# Altium PCB MM_2.0_pcb.PcbDoc (part 2 of 2)
Units mm, origin at the board's own origin, x right, y up, seen from the top; angles counter-clockwise.
Board outline 100 x 100 mm, 4 copper layers (Top_Layer, INT_L1_GND, INT_L2_GND, Bottom_Layer), stack 1.586 mm thick; 74 components, 72 nets, 343 pads, 105 vias.
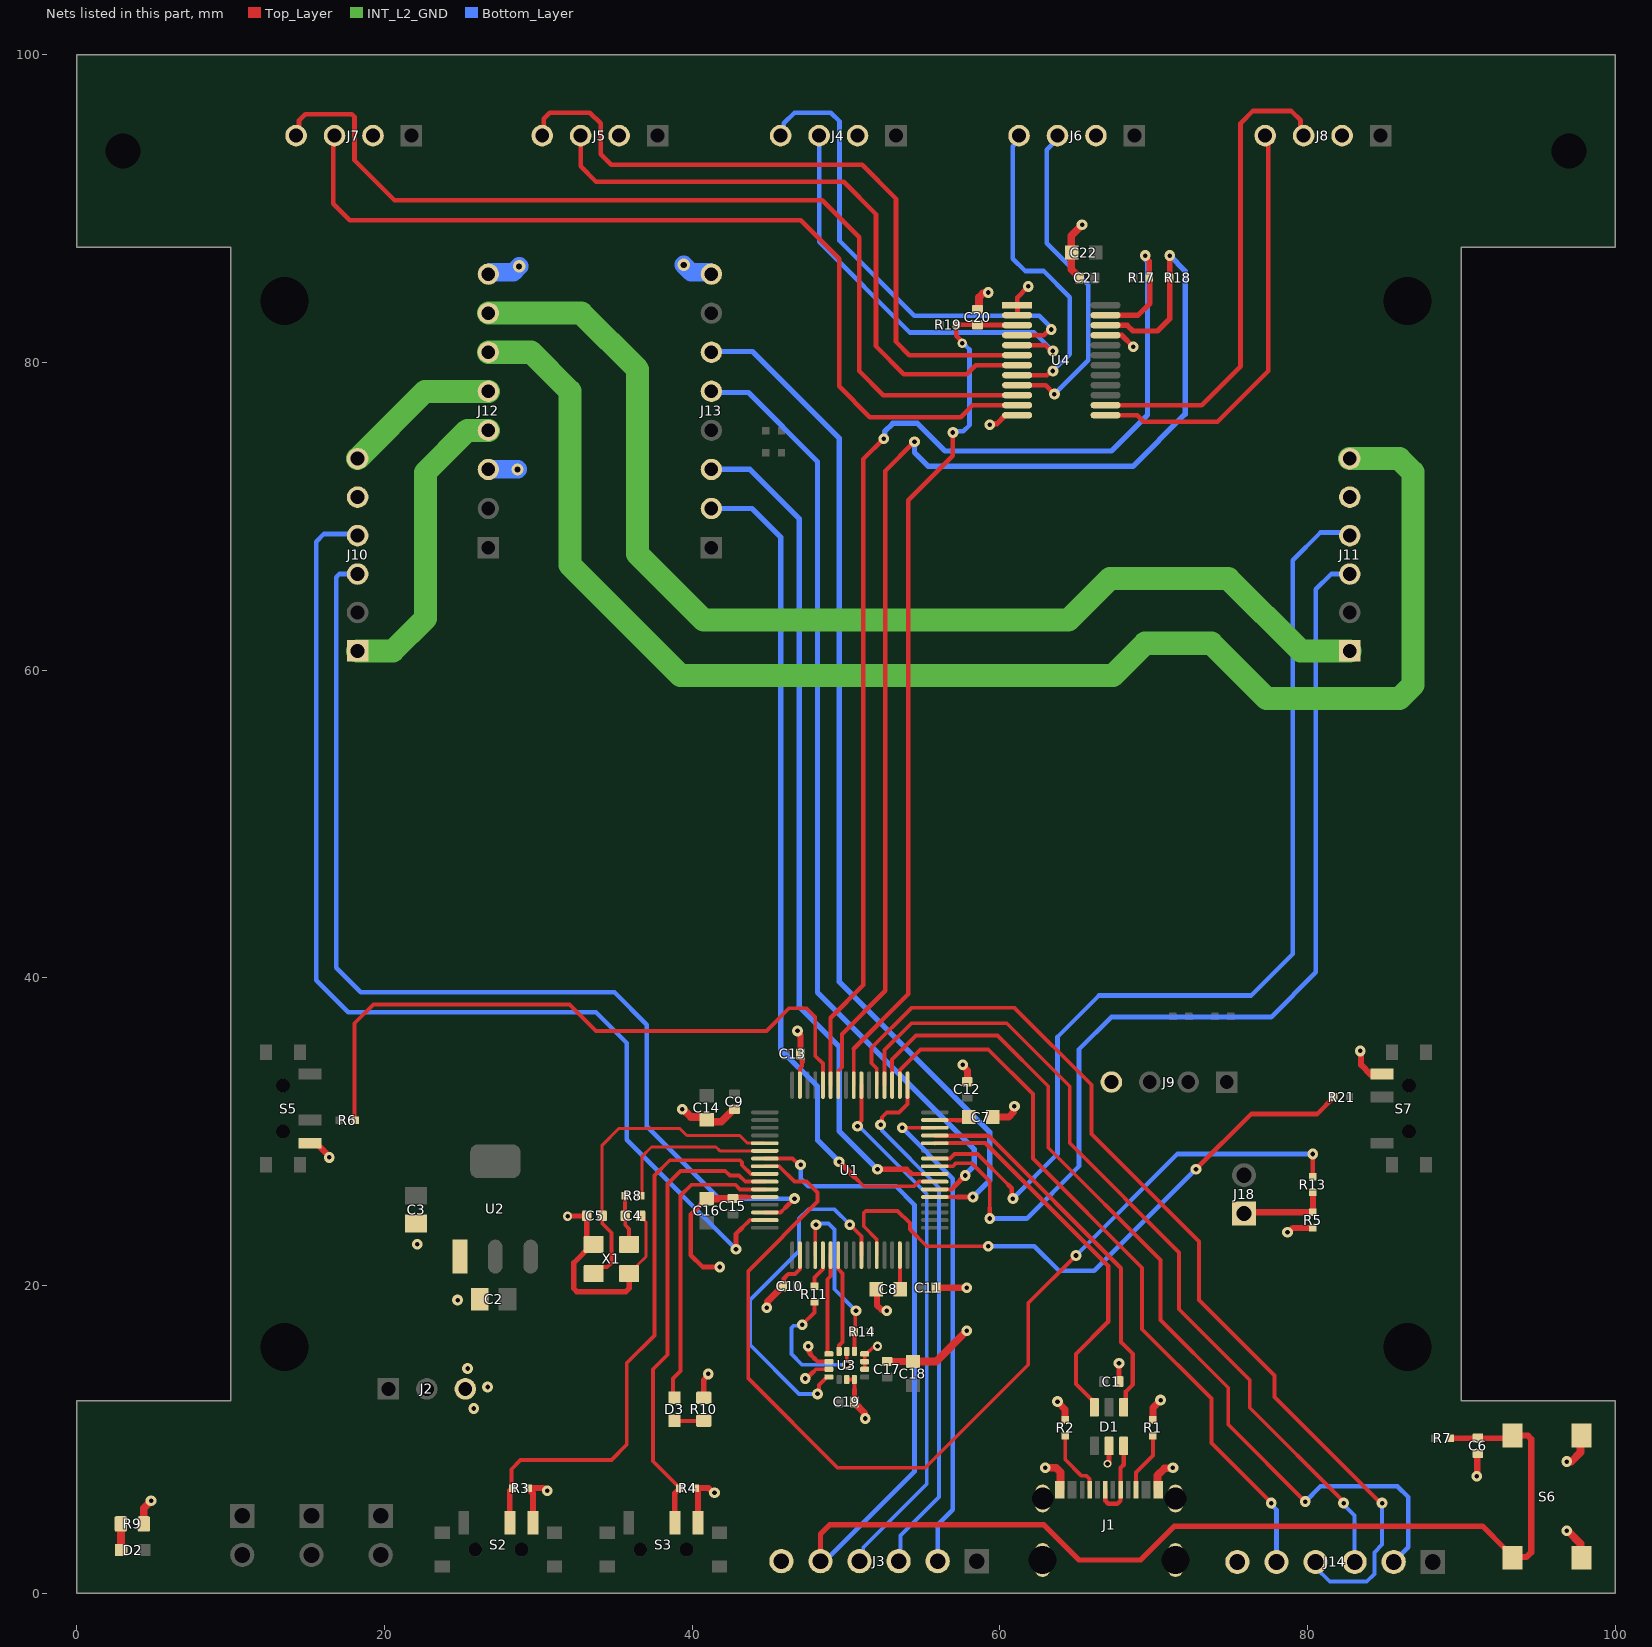
[diagram p4: the nets of this part, all layers, seen from the top]

## Via types
v1: diameter 0.7, hole 0.3, Top_Layer to Bottom_Layer, 92 vias
v2: diameter 0.6, hole 0.3, Top_Layer to Bottom_Layer, 6 vias
v3: diameter 0.8, hole 0.4, Top_Layer to Bottom_Layer, 4 vias
v4: diameter 0.9, hole 0.4, Top_Layer to Bottom_Layer, 2 vias
v5: diameter 0.5, hole 0.3, Top_Layer to Bottom_Layer, 1 vias

## Nets (pads, with @x,y where several pads share a name; then routed paths per layer and width w, separated by ;. In a path a pad name is that pad's centre, name@x,y a point inside that pad or via, vN(x,y) a via of type N, cw(c..) or ccw(c..) an arc to the next point about the centre after c; other vN are vias at no path point) (continued)
ESD_USB_D_P: D1.3 J1.A6 J1.B6 | length 5.5
  Top_Layer w0.281: J1.A6@66.85,6.725 66.85,6.015 67.055,5.809 67.641,5.809 67.841,6.009 67.841,6.716 J1.B6@67.85,6.725 67.843,6.732 67.843,8.143 68.05,8.35 D1.3@68.05,9.57
GND: C1.1 C2.2 C3.2 C4.1 C5.1 C6.1 C7.2 C8.2 C9.1 C10.1 C11.1 C12.1 C13.1 C14.2 C15.1 C16.2 C17.1 C18.2 C19.1 C20.1 C21.1 C22.2 D1.2 J1.A1B12 J1.B1A12 J1.S1 J1.S2 J1.S3 J1.S4 J2.3 J3.6 J4.2 J5.2 J6.2 J7.2 J8.2 J9.4 J10.5 J11.5 J12.3 J12.8 J13.8 J14.6 R1.1 R2.1 R3.1 R4.1 R5.1 R9.1 R10.1 S2.3 S3.3 S5.3 S6.3 S6.4 S7.3 U1.12 U1.18 U1.63 U2.1 U3.2 U3.3 U3.6 U3.7 U3.9 U3.10 U3.11 U4.1 U4.2 U4.12 U4.21 X1.2 X1.4 | length 110.9
  Top_Layer w0.2: X1.4@35.9,20.775 36,20.775 36.45,21.225 36.45,21.325 37,21.875 37,24.125 36.65,24.475 C4.1@36.65,24.525
  Top_Layer w0.25: 43.55,25.75 U1.12@44.725,25.75 ; 46.15,20.65 46.25,20.75 46.686,20.75 47,21.064 U1.18@47,21.975 ; U1.63@47,33.025 47,34.1 47.15,34.25 47.15,34.55 ; 47.85,14.35 48.05,14.55 U3.3@48.885,14.55 ; 47.95,15.25 48.15,15.05 U3.2@48.885,15.05 ; U3.6@50.05,13.885 U3.7@50.55,13.885 50.55,13.25 ; U3.9@51.215,14.55 U3.10@51.215,15.05 U3.11@51.215,15.55 51.265,15.6 51.385,15.6 51.768,15.983 51.983,15.983 v2(52.05,16.05) ; R2.1@64.25,11.262 R2.1@64.313,11.325 ; R1.1@69.95,11.262 R1.1@69.987,11.299
  Top_Layer w0.3: C16.2@40.95,25.63 40.92,25.63 39.9,24.61 39.9,21.976 40.676,21.2 v1(41.8,21.2) ; 43.35,25.75 43.55,25.75 ; C10.1@45.85,19.95 45.95,20.05 45.95,20.45 46.15,20.65 ; v1(47.35,13.95) 47.45,13.95 47.85,14.35 ; 47.65,15.65 47.65,15.55 47.95,15.25 ; C19.1@50.55,12.425 50.55,13.25 ; U4.2@61.125,83.075 61.15,83.1 61.15,83.7 U4.1@61.125,83.725 61.125,84.225 v1(61.85,84.95)
  Top_Layer w0.35: v2(31.9,24.5) 31.913,24.513 33.137,24.513 C5.1@33.15,24.525 33.15,23.05 X1.2@33.525,22.675 ; X1.2@33.6,22.675 X1.2@33.525,22.675 ; X1.4@35.9,20.775 35.9,19.805 35.695,19.6 32.505,19.6 32.3,19.805 32.3,21.475 33.5,22.675 X1.2@33.525,22.675 ; R10.1@40.75,12.7 40.75,13.855 41.05,14.155 v1(41.05,14.25) ; C15.1@42.64,25.64 C15.1@42.65,25.65 42.75,25.75 43.35,25.75 ; C13.1@47.05,35.05 47.15,34.95 47.15,34.55 ; v1(47.55,16.05) 47.617,15.983 47.617,15.683 47.65,15.65 ; v1(59.35,75.95) 59.417,76.017 59.799,76.017 60.357,76.575 U4.12@61.125,76.575 ; U4.21@66.875,81.775 66.889,81.761 67.939,81.761 v1(68.675,81.025) ; v5(67,8.4) 67,8.441 67.1,8.541 D1.2@67.1,9.57 ; C1.1@67.75,13.75 v1(67.75,14.95) ; S7.3@84.125,33.7 84.8,33.7 S7.3@84.85,33.75
  Top_Layer w0.4: S5.3@15.15,29.25 15.55,29.25 16.4,28.4 v1(16.4,28.325) ; S2.3@29.65,4.575 29.65,6.5 29.337,6.813 R3.1@29.337,6.825 30.319,6.825 30.494,6.65 v1(30.575,6.65) ; R4.1@40.212,6.825 41.069,6.825 41.369,6.525 v1(41.45,6.525) ; S3.3@40.375,4.575 R4.1@40.375,6.65 ; v1(46.85,36.55) 46.85,36.469 47.05,36.269 C13.1@47.05,35.05 ; C8.2@51.97,19.75 52.01,19.71 52.01,18.706 52.309,18.407 52.593,18.407 v1(52.65,18.35) ; v1(78.7,23.462) 78.781,23.462 79.057,23.738 R5.1@80.35,23.738 ; v1(83.425,35.25) 83.482,35.193 83.482,34.343 S7.3@84.125,33.7 ; v1(91,7.6) 91.037,7.637 91.037,9.038 C6.1@91.075,9.075
  Top_Layer w0.45: v1(44.85,18.55) 44.898,18.598 44.898,18.948 45.85,19.9 C10.1@45.85,19.95 ; C19.1@50.55,12.425 50.55,12.375 51.202,11.723 51.202,11.398 v1(51.25,11.35) ; C17.1@52.675,15.05 52.678,15.053 54.348,15.053 C18.2@54.35,15.055 ; C11.1@55.85,19.85 v1(57.85,19.85) ; v1(57.59,34.35) 57.59,34.282 57.89,33.982 C12.1@57.89,33.25 ; C7.2@59.55,30.95 60.587,30.95 60.902,31.265 60.902,31.602 v1(60.95,31.65) ; v1(63.75,12.45) 64.25,11.95 R2.1@64.25,11.262 ; R1.1@69.95,11.262 69.95,12.05 v1(70.45,12.55)
  Top_Layer w0.5: R9.1@4.35,4.5 4.35,5.525 v1(4.825,6) ; v1(39.35,31.45) 39.404,31.45 39.899,30.955 40.765,30.955 C14.2@40.95,30.77 41.07,30.65 41.9,30.65 42.7,31.45 C9.1@42.75,31.45 ; C16.2@40.95,25.63 40.96,25.64 C15.1@42.64,25.64 ; C18.2@54.35,15.055 55.855,15.055 v1(57.85,17.05) ; C20.1@58.55,83.45 58.6,83.45 58.65,83.5 58.65,84.25 58.912,84.512 59.212,84.512 v1(59.25,84.55) ; v1(62.95,8.15) 63.65,8.15 63.95,7.85 63.95,7.55 63.95,6.775 J1.A1B12@63.9,6.725 ; C21.1@65.175,85.5 65.175,85.55 64.65,86.075 64.65,88.25 v1(65.35,88.95) ; J1.B1A12@70.3,6.725 70.25,6.775 70.25,7.65 70.712,8.112 71.212,8.112 v1(71.25,8.15) ; v1(96.85,4.05) 96.916,4.05 97.75,3.216 97.75,2.375 S6.3@97.825,2.3 ; v1(96.85,8.55) 97.15,8.55 97.75,9.15 97.75,10.175 S6.4@97.825,10.25
  Bottom_Layer w1.2: J12.3@26.75,73.05 v3(28.65,73.05) ; J12.8@26.75,85.75 26.863,85.863 28.363,85.863 v3(28.75,86.25) ; v3(39.45,86.35) 39.937,85.863 41.137,85.863 J13.8@41.25,85.75
  other v1: 25.8,12 26.7,13.4 25.4,14.6 24.75,19.05 22.125,22.675
IMU_INT: U1.26 U3.4 | length 23
  Top_Layer w0.25: v1(48.15,12.95) 48.236,13.036 48.236,13.521 48.765,14.05 U3.4@48.885,14.05 ; v1(50.25,23.95) 51,23.2 U1.26@51,21.975
  Bottom_Layer w0.25: v1(48.15,12.95) 46.95,12.95 43.754,16.146 43.754,19.054 46.95,22.25 46.95,24.35 47.55,24.95 49.25,24.95 v1(50.25,23.95)
IMU_MISO: U1.22 U3.1 | length 6.6
  Top_Layer w0.25: U3.1@48.885,15.55 48.85,15.55 48.8,15.6 48.8,20.4 49,20.6 U1.22@49,21.975
IMU_MOSI: U1.23 U3.14 | length 6.5
  Top_Layer w0.25: U1.23@49.5,21.975 49.5,21.064 49.775,20.789 49.775,16.318 49.55,16.093 U3.14@49.55,15.715
IMU_NCS: R14.1 U1.20 U3.12 | length 11.9
  Top_Layer w0.25: U1.20@48,21.975 48,23.9 v1(48.05,23.95) ; U3.12@50.55,15.715 50.552,15.717 R14.1@50.554,16.98 50.602,17.028 50.602,18.302 v1(50.65,18.35)
  Bottom_Layer w0.25: v1(48.05,23.95) 48.136,24.036 48.864,24.036 49.25,23.65 49.25,19.75 v1(50.65,18.35)
IMU_SCLK: R11.1 U3.13 | length 9
  Top_Layer w0.25: v1(47.15,17.45) 47.95,18.25 R11.1@47.95,18.926 ; v2(50.05,14.85) U3.13@50.05,15.715
  Bottom_Layer w0.25: v1(47.15,17.45) 47.078,17.378 46.596,17.378 46.45,17.232 46.45,15.55 47.15,14.85 v2(50.05,14.85)
IMU_SCLK_R: R11.2 U1.21 | length 2.3
  Top_Layer w0.25: R11.2@47.95,19.95 47.95,20.514 48.5,21.064 U1.21@48.5,21.975
LM_ENC_CHA: J10.3 U1.14 | length 69.1
  Top_Layer w0.25: U1.14@44.725,24.75 45.75,24.75 46.05,25.05
  Top_Layer w0.3: 46.05,25.05 v1(46.65,25.65)
  Bottom_Layer w0.3: J10.3@18.25,66.25 17.05,66.25 16.85,66.05 16.85,40.65 18.45,39.05 34.95,39.05 37.05,36.95 37.05,30.35 41.75,25.65 v1(46.65,25.65)
LM_ENC_CHB: J10.4 U1.15 | length 72.9
  Top_Layer w0.25: 43.25,23.75 43.75,24.25 U1.15@44.725,24.25
  Top_Layer w0.3: v1(42.85,22.35) 42.85,23.35 43.25,23.75
  Bottom_Layer w0.3: J10.4@18.25,68.75 18.15,68.85 16.05,68.85 15.55,68.35 15.55,39.85 17.65,37.75 33.75,37.75 35.737,35.763 35.737,29.463 v1(42.85,22.35)
LM_N: J10.6 J12.5 | length 10.3
  INT_L2_GND w1.5: J10.6@18.25,73.75 22.63,78.13 J12.5@26.75,78.13
LM_P: J10.1 J12.4 | length 20
  INT_L2_GND w1.5: J10.1@18.25,61.25 20.55,61.25 22.65,63.35 22.65,72.85 25.39,75.59 J12.4@26.75,75.59
LM_PWM_INA: J13.2 U1.39 | length 54.5
  Top_Layer w0.25: 50.55,27.05 51.15,26.45 54.426,26.45 54.726,26.75 55,26.75 U1.39@55.775,26.75
  Top_Layer w0.35: v1(49.55,28.05) 50.55,27.05
  Bottom_Layer w0.35: J13.2@41.25,70.51 43.89,70.51 45.75,68.65 45.75,35.35 48.15,32.95 48.15,29.45 v1(49.55,28.05)
LM_PWM_INB: J13.3 U1.40 | length 55.3
  Top_Layer w0.25: 54.25,27.25 U1.40@55.775,27.25
  Top_Layer w0.35: v1(52.05,27.55) 53.95,27.55 54.25,27.25
  Bottom_Layer w0.35: J13.3@41.25,73.05 43.75,73.05 46.95,69.85 46.95,38.15 49.55,35.55 49.55,30.05 v1(52.05,27.55)
MCU_BOOT0: R6.2 U1.60 | length 43
  Top_Layer w0.25: R6.2@18.087,30.75 18.05,30.787 18.05,37.05 19.275,38.275 32.025,38.275 33.75,36.55 44.825,36.55 46.3,38.025 47.425,38.025 48,37.45 48,34.925 48.5,34.425 U1.60@48.5,33.025
MCU_BOOT1: R21.2 U1.28 | length 40.2
  Top_Layer w0.25: U1.28@52,21.975 52,23 51.15,23.85 51.15,24.704 51.296,24.85 53.35,24.85 54.15,24.05 54.15,23.65 55.25,22.55 v1(59.25,22.55)
  Top_Layer w0.3: v1(72.75,27.55) 76.35,31.15 80.625,31.15 81.713,32.238 R21.2@81.713,32.25
  Bottom_Layer w0.3: v1(59.25,22.55) 62.25,22.55 63.85,20.95 66.15,20.95 v1(72.75,27.55)
MCU_LED: D3.2 U1.11 | length 19.3
  Top_Layer w0.25: D3.2@38.85,12.7 38.75,12.8 38.75,13.95 39.25,14.45 39.25,25.85 39.95,26.55 42.816,26.55 43.116,26.25 U1.11@44.725,26.25
MCU_LED_K: D3.1 R10.2 | length 1.9
  Top_Layer w0.25: D3.1@38.85,11.2 R10.2@40.75,11.2
MCU_NRST: C6.2 J3.5 R7.1 S6.1 S6.2 U1.7 | length 101.2
  Top_Layer w0.25: U1.7@44.725,28.25 46.528,28.25 46.928,27.85 v1(47.05,27.85)
  Top_Layer w0.35: J3.5@48.34,2.075 48.34,3.84 48.95,4.45 62.85,4.45 65.15,2.15 69.15,2.15 71.35,4.35 91.375,4.35 92.825,2.9 92.85,2.9 93.375,2.375 S6.1@93.375,2.35 ; R7.1@89.287,10.075 C6.2@91.075,10.075 93.15,10.075 S6.2@93.325,10.25
  Top_Layer w0.4: S6.2@93.325,10.25 94.316,10.25 94.55,10.016 94.55,2.65 94.25,2.35 S6.1@93.375,2.35
  Bottom_Layer w0.3: v1(47.05,27.85) 47.05,26.95 47.55,26.45 53.25,26.45 54.45,25.25 54.45,7.9 48.625,2.075 J3.5@48.34,2.075
MCU_OSC_IN: C5.2 U1.5 X1.3 | length 20.8
  Top_Layer w0.2: C5.2@34.15,24.525 34.15,29.125 35.225,30.2 39.2,30.2 39.65,29.75 43.1,29.75 43.6,29.25 U1.5@44.725,29.25
  Top_Layer w0.25: X1.3@33.6,20.775 34.025,21.2 34.479,21.2 34.75,21.471 34.75,23.425 34.15,24.025 C5.2@34.15,24.525
MCU_OSC_OUT: R8.1 U1.6 | length 10.9
  Top_Layer w0.2: R8.1@36.662,25.825 36.725,25.888 36.725,28.375 37.35,29 41.55,29 41.8,28.75 U1.6@44.725,28.75
MCU_SWCLK: J3.3 U1.49 | length 34.8
  Top_Layer w0.25: v1(52.25,30.45) 52.336,30.536 52.336,30.934 52.652,31.25 53.45,31.25 54,31.8 U1.49@54,33.025
  Bottom_Layer w0.25: v1(52.25,30.45) 52.336,30.364 52.336,30.064 56.05,26.35 56.05,6.25 53.535,3.735 53.535,2.685 53.5,2.65 53.45,2.65 53.42,2.62 J3.3@53.42,2.075
MCU_SWDIO: J3.2 U1.46 | length 32.1
  Top_Layer w0.25: v1(53.65,30.25) U1.46@55.775,30.25
  Bottom_Layer w0.3: v1(53.65,30.25) 56.95,26.95 56.95,5.425 55.96,4.435 J3.2@55.96,2.075
MCU_SWO: J3.4 U1.55 | length 34.8
  Top_Layer w0.25: v1(50.75,30.35) 50.75,30.472 51,30.722 U1.55@51,33.025
  Bottom_Layer w0.25: v1(50.75,30.35) 50.85,30.35 55.25,25.95 55.25,7.1 51.123,2.973 51.123,2.318 J3.4@50.88,2.075
MCU_VCAP1: C8.1 U1.31 | length 2.1
  Top_Layer w0.25: U1.31@53.5,21.975 53.5,20.08 C8.1@53.63,19.95
MCU_VCAP2: C7.1 U1.47 | length 2.3
  Top_Layer w0.25: U1.47@55.775,30.75 57.15,30.75
  Top_Layer w0.3: 57.15,30.75 57.79,30.75 C7.1@57.99,30.95
MOD_SWA: R3.2 S2.2 U1.9 | length 38
  Top_Layer w0.25: R3.2@28.313,6.825 28.25,6.888 28.25,8.05 28.85,8.65 34.75,8.65 35.75,9.65 35.75,14.95 37.55,16.75 37.55,27.15 38.538,28.138 43.116,28.138 43.25,28.004 43.25,27.814 43.814,27.25 U1.9@44.725,27.25
  Top_Layer w0.35: S2.2@28.15,4.575 28.15,6.65 28.313,6.813 R3.2@28.313,6.825
MOD_SWB: R4.2 S3.2 U1.10 | length 30.2
  Top_Layer w0.25: R4.2@39.188,6.825 39.188,6.837 37.45,8.575 37.45,14.55 38.4,15.5 38.4,26.6 39.25,27.45 42.15,27.45 42.45,27.15 43.05,27.15 43.45,26.75 U1.10@44.725,26.75
  Top_Layer w0.35: S3.2@38.875,4.575 38.875,6.5 39.188,6.813 R4.2@39.188,6.825
MOD_SWM: J18.1 R5.2 R13.1 | length 5.8
  Top_Layer w0.35: J18.1@75.875,24.675 J18.1@75.875,24.675
  Top_Layer w0.4: J18.1@75.875,24.675 75.962,24.762 R5.2@80.35,24.762 R13.1@80.35,26.038
MOD_SWM_R: R13.2 U1.8 | length 69.5
  Top_Layer w0.25: U1.8@44.725,27.75 45.65,27.75 46.65,26.75 47.45,26.75 48.15,26.05 48.15,25.45 43.65,20.95 43.65,13.95 49.45,8.15 55.15,8.15 61.85,14.85 61.85,18.85 v1(64.95,21.95)
  Top_Layer w0.3: R13.2@80.35,27.062 v1(80.35,28.55)
  Bottom_Layer w0.3: v1(64.95,21.95) 71.55,28.55 v1(80.35,28.55)
MUX_NRST: C20.2 R19.1 U1.56 U4.3 | length 57.3
  Top_Layer w0.25: U1.56@50.5,33.025 50.5,35.4
  Top_Layer w0.3: 50.5,35.4 54.05,38.95 54.05,71.05 56.95,73.95 v1(56.95,75.45) ; v2(57.55,81.25) 57.55,81.358 57.162,81.746 R19.1@57.162,82.45 C20.2@58.55,82.45 58.562,82.437 61.112,82.437 U4.3@61.125,82.425
  Bottom_Layer w0.3: v1(56.95,75.45) 57.027,75.527 57.627,75.527 58.031,75.931 58.031,80.85 57.631,81.25 v2(57.55,81.25)
MUX_SCL: R18.1 U1.58 U4.22 | length 83.4
  Top_Layer w0.25: U1.58@49.5,33.025 49.5,33.936 49.75,34.186 49.75,36.35
  Top_Layer w0.3: 49.75,36.35 52.55,39.15 52.55,72.95 v1(54.45,74.85)
  Top_Layer w0.35: U4.22@66.875,82.425 68.275,82.425 68.65,82.05 70.25,82.05 71.05,82.85 R18.1@71.05,85.525 v1(71.05,86.95)
  Bottom_Layer w0.35: v1(54.45,74.85) 54.45,74.15 55.35,73.25 68.65,73.25 72.05,76.65 72.05,85.95 v1(71.05,86.95)
MUX_SDA: R17.1 U1.59 U4.23 | length 79.8
  Top_Layer w0.25: U1.59@49,33.025 49,37.4
  Top_Layer w0.3: 49,37.4 51.131,39.531 51.131,73.731 v1(52.45,75.05)
  Top_Layer w0.35: U4.23@66.875,83.075 68.975,83.075 69.75,83.85 69.75,85.499 R17.1@69.724,85.525 69.724,86.581 69.45,86.855 v1(69.45,86.95)
  Bottom_Layer w0.35: v1(52.45,75.05) 52.517,75.117 52.517,75.517 53.05,76.05 54.65,76.05 56.45,74.25 67.25,74.25 69.6,76.6 69.6,86.57 69.517,86.653 69.517,86.883 v1(69.45,86.95)
PA15_GPIO: J14.5 U1.50 | length 48.4
  Top_Layer w0.25: U1.50@53.5,33.025 53.5,34 54.85,35.35 59.25,35.35 62.15,32.45 62.15,28.25 69.25,21.15 69.25,17.15 73.75,12.65 73.75,9.75 v1(77.65,5.85)
  Bottom_Layer w0.3: v1(77.65,5.85) 77.65,5.742 77.985,5.407 J14.5@77.985,2.025
PC10_GPIO: J14.2 U1.51 | length 59.8
  Top_Layer w0.25: U1.51@53,33.025 53,34.7 54.55,36.25 59.85,36.25 63.15,32.95 63.15,28.95 70.45,21.65 70.45,17.75 74.85,13.35 74.85,10.95 v1(79.85,5.95)
  Bottom_Layer w0.3: v1(79.85,5.95) 80.85,6.95 85.85,6.95 86.55,6.25 86.55,2.97 J14.2@85.605,2.025
PC11_GPIO: J14.3 U1.52 | length 55.3
  Top_Layer w0.25: U1.52@52.5,33.025 52.5,35.3 54.25,37.05 60.45,37.05 64.55,32.95 64.55,29.25 71.65,22.15 71.65,18.45 76.25,13.85 76.25,12.05 82.35,5.95 v1(82.35,5.85)
  Bottom_Layer w0.25: v1(82.35,5.85) 82.35,5.75 83.065,5.035 J14.3@83.065,2.025
PC12_GPIO: J14.4 U1.53 | length 64.7
  Top_Layer w0.25: U1.53@52,33.025 52,34.1 51.65,34.45 51.65,35.45 54.25,38.05 60.95,38.05 65.95,33.05 65.95,29.85 72.95,22.85 72.95,19.05 77.85,14.15 77.85,12.75 84.75,5.85 v1(84.85,5.85)
  Bottom_Layer w0.25: J14.4@80.525,2.025 80.525,1.675 81.45,0.75 83.85,0.75 84.35,1.25 84.35,2.65 84.85,3.15 v1(84.85,5.85)
PWR_LED_K: D2.2 R9.2 | length 1.7
  Top_Layer w0.4: R9.2@2.85,4.5 R9.2@2.862,4.487 ; D2.2@2.862,2.813 D2.2@2.875,2.8
  Top_Layer w0.5: D2.2@2.862,2.813 R9.2@2.862,4.487
RM_ENC_CHA: J11.3 U1.41 | length 66.3
  Top_Layer w0.25: U1.41@55.775,27.75 56.95,27.75 57.15,27.95 58.15,27.95 59.35,26.75 59.35,25.05
  Top_Layer w0.3: v1(59.35,24.35) 59.35,25.05
  Bottom_Layer w0.3: v1(59.35,24.35) 61.75,24.35 65.15,27.75 65.15,35.35 67.25,37.45 77.65,37.45 80.55,40.35 80.55,65.25 81.55,66.25 J11.3@82.75,66.25
RM_ENC_CHB: J11.4 U1.42 | length 66.1
  Top_Layer w0.25: U1.42@55.775,28.25 56.75,28.25 57.05,28.55 58.55,28.55 60.55,26.55
  Top_Layer w0.3: 60.55,26.55 60.773,26.327 60.773,25.727 v1(60.85,25.65)
  Bottom_Layer w0.3: v1(60.85,25.65) 63.75,28.55 63.75,36.15 66.45,38.85 76.35,38.85 79.05,41.55 79.05,67.15 80.85,68.95 82.55,68.95 J11.4@82.75,68.75
RM_N: J11.6 J12.6 | length 96.5
  INT_L2_GND w1.5: J12.6@26.75,80.67 29.53,80.67 32.05,78.15 32.05,66.85 39.25,59.65 67.35,59.65 69.45,61.75 73.75,61.75 77.35,58.15 85.971,58.15 86.85,59.029 86.85,72.871 85.971,73.75 J11.6@82.75,73.75
RM_P: J11.1 J12.7 | length 74.4
  INT_L2_GND w1.5: J12.7@26.75,83.21 32.79,83.21 36.45,79.55 36.45,67.55 40.75,63.25 64.45,63.25 67.15,65.95 74.85,65.95 79.55,61.25 J11.1@82.75,61.25
RM_PWM_INA: J13.6 U1.37 | length 67
  Top_Layer w0.25: U1.37@55.775,25.75 57.25,25.75
  Top_Layer w0.35: 57.25,25.75 v1(58.25,25.75)
  Bottom_Layer w0.35: J13.6@41.25,80.67 41.301,80.721 43.915,80.721 49.55,75.086 49.55,39.75 59.35,29.95 59.35,26.85 v1(58.25,25.75)
RM_PWM_INB: J13.5 U1.38 | length 62
  Top_Layer w0.25: U1.38@55.775,26.25 56.85,26.25 57.05,26.45
  Top_Layer w0.35: 57.05,26.45 v1(57.75,27.15)
  Bottom_Layer w0.35: J13.5@41.25,78.13 41.33,78.05 43.65,78.05 48.15,73.55 48.15,39.05 58.35,28.85 58.35,27.787 57.75,27.187 v1(57.75,27.15)
TOF_SC0: J4.3 U4.5 | length 27.5
  Top_Layer w0.3: U4.5@61.125,81.125 61.225,81.125 61.25,81.15 61.275,81.125 62.967,81.125 63.342,80.75 v1(63.45,80.75)
  Bottom_Layer w0.3: J4.3@48.25,94.75 48.25,87.85 54.15,81.95 62.25,81.95 v1(63.45,80.75)
TOF_SC1: J5.3 U4.7 | length 41.2
  Top_Layer w0.3: J5.3@32.75,94.75 32.75,92.75 33.75,91.75 49.85,91.75 51.95,89.65 51.95,81.05 53.75,79.25 57.85,79.25 58.425,79.825 U4.7@61.125,79.825
TOF_SC2: J6.3 U4.9 | length 21.8
  Top_Layer w0.3: U4.9@61.148,78.548 U4.9@61.125,78.525 62.975,78.525 v1(63.55,77.95)
  Bottom_Layer w0.3: v1(63.55,77.95) 65.75,80.15 65.75,85.05 63.05,87.75 63.05,93.824 63.75,94.524 J6.3@63.75,94.75
TOF_SC3: J7.3 U4.11 | length 59.8
  Top_Layer w0.3: J7.3@16.75,94.75 16.674,94.674 16.674,90.326 17.75,89.25 47.05,89.25 49.55,86.75 49.55,78.45 51.55,76.45 57.45,76.45 58.225,77.225 U4.11@61.125,77.225
TOF_SC4: J8.3 U4.14 | length 31.2
  Top_Layer w0.3: U4.14@66.875,77.225 73.125,77.225 75.65,79.75 75.65,95.55 76.45,96.35 78.95,96.35 79.55,95.75 79.55,94.95 J8.3@79.75,94.75
TOF_SD0: J4.4 U4.4 | length 31.4
  Top_Layer w0.3: U4.4@61.125,81.775 62.867,81.775 63.242,82.15 v1(63.35,82.15)
  Bottom_Layer w0.3: J4.4@45.75,94.75 45.96,94.96 45.96,95.56 46.65,96.25 49.019,96.25 49.576,95.694 49.576,87.924 54.45,83.05 62.55,83.05 63.35,82.25 v1(63.35,82.15)
TOF_SD1: J5.4 U4.6 | length 45.2
  Top_Layer w0.3: J5.4@30.25,94.75 30.35,94.85 30.35,95.85 30.75,96.25 33.35,96.25 34.05,95.55 34.05,93.55 34.75,92.85 51.05,92.85 53.25,90.65 53.25,81.35 54.125,80.475 U4.6@61.125,80.475
TOF_SD2: J6.4 U4.8 | length 20.6
  Top_Layer w0.3: U4.8@61.125,79.175 63.067,79.175 63.342,79.45 v1(63.45,79.45)
  Bottom_Layer w0.3: J6.4@61.25,94.75 61.25,94.452 60.85,94.052 60.85,86.75 61.65,85.95 62.85,85.95 64.55,84.25 64.55,80.55 v1(63.45,79.45)
TOF_SD3: J7.4 U4.10 | length 62.2
  Top_Layer w0.3: J7.4@14.25,94.75 14.438,94.938 14.438,95.738 14.45,95.75 14.85,96.15 17.874,96.15 18.05,95.974 18.05,93.15 20.65,90.55 48.45,90.55 50.85,88.15 50.85,79.45 52.425,77.875 U4.10@61.125,77.875
TOF_SD4: J8.4 U4.13 | length 27.5
  Top_Layer w0.3: U4.13@66.875,76.575 68.925,76.575 69.35,76.15 74.15,76.15 77.45,79.45 77.45,94.55 J8.4@77.25,94.75
USB_CC1: J1.A5 R2.2 | length 4.4
  Top_Layer w0.25: R2.2@64.25,10.238 64.25,8.696 65.321,7.625 65.635,7.625 65.825,7.435 65.825,6.75 J1.A5@65.85,6.725
USB_CC2: J1.B5 R1.2 | length 4
  Top_Layer w0.25: J1.B5@68.85,6.725 68.85,7.85 69.95,8.95 R1.2@69.95,10.238
USB_D_N: D1.6 U1.44 | length 25.1
  Top_Layer w0.281: U1.44@55.775,29.25 55.783,29.258 59.057,29.258 67.05,21.265 67.05,17.65 64.95,15.55 64.95,13.59 66.15,12.39 D1.6@66.15,12.08
USB_D_P: D1.4 U1.45 | length 25.3
  Top_Layer w0.281: U1.45@55.775,29.75 55.783,29.742 59.258,29.742 67.882,21.118 67.882,16.318 68.65,15.55 68.65,13.562 68.194,13.107 68.194,12.224 D1.4@68.05,12.08
XTAL_IN: C4.2 R8.2 X1.1 | length 3.3
  Top_Layer w0.25: R8.2@35.638,25.825 35.644,25.819 35.644,24.531 C4.2@35.65,24.525 35.65,23.925 35.9,23.675 X1.1@35.9,22.675
pads on no net: J1.A8 J1.B8 J12.2 J13.1 J13.7 S2. S2.SH1 S2.SH2 S2.SH3 S2.SH4 S3. S3.SH1 S3.SH2 S3.SH3 S3.SH4 S5. S5.SH1 S5.SH2 S5.SH3 S5.SH4 S7. S7.SH1 S7.SH2 S7.SH3 S7.SH4 U1.2 U1.3 U1.4 U1.16 U1.17 U1.24 U1.25 U1.27 U1.33 U1.34 U1.36 U1.43 U1.54 U1.57 U1.61 U1.62 U4.15 U4.16 U4.17 U4.18 U4.19 U4.20

## Polygon pours and split planes (outlines as drawn)
+3V3_EXT on Top_Layer "+3V3_EXT_L01_P043" (solid, pour order 43): 65.75,88 66.85,88 67.4,88.55 68.325,88.55 68.775,88.1 68.775,87.325 68.15,86.7 67.225,86.7 66.725,86.2 66.725,85 67.7,84.025 67.875,83.85 67.875,83.6 67.775,83.5 65.9,83.5 65.85,83.55 65.9,83.6 65.9,85.15 65.85,85.2 65.85,86.525 65.75,86.625
+3V3_EXT on Top_Layer "+3V3_EXT_L01_P032" (solid, pour order 32): 67.1,47 70.4,47 70.4,43.7 67.1,43.7
GND on Top_Layer "GND_L01_P017" (solid, pour order 17): 21.35,24.65 22.85,24.65 23.05,24.45 23.05,23.45 23.45,23.05 25.35,23.05 25.55,22.85 25.55,20.35 25.95,19.95 26.75,19.95 26.85,19.85 26.85,18.35 26.65,18.15 24.55,18.15 21.15,21.55 21.15,24.35
+3V3_USB on Top_Layer "+3V3_USB_L01_P022" (solid, pour order 22): 21.25,25.25 21.25,27.35 23.15,29.25 28.55,29.25 29.25,28.55 29.25,25.55 27.75,24.05 27.75,20.85 27.55,20.65 26.85,20.65 26.65,20.85 26.65,23.45 24.85,25.25
+5V_VBUS on Top_Layer "+5V_VBUS_L01_P014" (solid, pour order 14): 64.4,7.325 65,7.325 65,5.425 65.35,5.075 68.6,5.075 69.2,5.675 69.2,7.325 69.8,7.325 69.8,5.05 68.75,4 65.175,4 64.4,4.775
+5V_VBUS on Top_Layer "+5V_VBUS_L01_P004" (solid, pour order 4): 66.85,11.45 67.35,11.45 67.45,11.55 67.45,12.85 67.075,13.225 67.075,15.025 66.65,15.45 65.95,15.45 65.75,15.25 65.75,14.15 66.25,13.65 66.25,13.35 66.75,12.85 66.75,11.55
+5V_VBUS on Top_Layer "+5V_VBUS_L01_P003" (solid, pour order 3): 29.15,23.15 28.85,22.85 28.85,20.65 28.197,19.997 27.497,19.997 27.35,19.85 27.35,18.25 27.55,18.05 30.95,18.05 31.45,18.55 31.45,20.35 30.25,21.55 30.25,22.85 29.95,23.15
GND on INT_L2_GND "GND_L03_P042" (solid, remove dead copper, pour order 42): 0.5,99.5 99.5,99.5 99.5,88 89.5,88 89.5,12 99.5,12 99.5,0.5 0.5,0.5 0.5,12 10.5,12 10.5,88 0.5,88
+3V3 on INT_L2_GND "+3V3_L03_P040" (solid, pour order 40): 73.175,25.95 75.875,25.95 77.4,27.475 76.2,28.675 76.075,28.8 74.075,26.8 73.175,26.8
+3V3 on INT_L2_GND "+3V3_L03_P036" (solid, pour order 36): 57.5,18.975 61.175,18.975 61.175,17.775 57.5,17.775
+5V_VBUS on INT_L2_GND "+5V_VBUS_L03_P013" (solid, pour order 13): 29.85,20.65 28.95,19.75 28.95,18.55 29.25,18.25 31.05,18.25 31.65,18.85 31.65,19.55 30.55,20.65
GND on INT_L1_GND "GND_L02_P000" (solid, remove dead copper, pour order 0): 0.5,99.5 99.5,99.5 99.5,88 89.5,88 89.5,12 99.5,12 99.5,0.5 0.5,0.5 0.5,12 10.5,12 10.5,88 0.5,88
GND on Bottom_Layer "GND_L04_P045" (solid, pour order 45): 25.1,15.4 27.3,15.4 28.3,14.4 28.3,12.1 27.3,11.1 25.3,11.1 24.4,12 24.4,14.7

## Silkscreen, mask and mechanical layers (free items; w line width, h text height)
Top Overlay:
  lines w0.2: 62.2,7.175 62.2,7.4 62.525,7.4 ; 62.535,0.475 62.535,0.675 ; 71.675,0.475 71.675,0.725 ; 71.7,7.4 72,7.4 72,7.2
  lines w0.3: 34.75,58.75 34.75,62.5 64.75,62.5 64.75,58.75 34.75,58.75
  text "TOF4" at 11.05,93.2 h1.2 r90
  text "GND" at 18.95,91.8 h1.2 r270
  text "+" at 21.7,90.75 h1.2
  text "SD" at 12.95,90.7 h1.2
  text "SC" at 15.95,90.7 h1.2
  text "TOF2" at 31.95,90.7 h1.2
  text "TOF1" at 47.95,90.7 h1.2
  text "TOF3" at 63.45,90.7 h1.2
  text "TOF5" at 79.7,90.7 h1.2
  text "GND" at 29.7,84.95 h1.2
  text "GND" at 35.2,84.95 h1.2
  text "NC" at 36.7,82.7 h1.2
  text "MUX" at 62.45,74.2 h1.2
  text "M-" at 12.2,73.2 h1.2
  text "GND" at 29.7,72.45 h1.2
  text "GND" at 10.95,70.7 h1.2
  text "NC" at 29.45,69.95 h1.2
  text "ENC" at 10.95,68.45 h1.2
  text "VM" at 29.45,67.2 h1.2
  text "NC" at 36.7,67.2 h1.2
  text "ENC" at 10.95,65.7 h1.2
  text "^" at 86.7,65.35 h1.2
  text "MOTOR DRIVER" at 24.95,64.7 h1.2
  text "VCC" at 10.95,63.2 h1.2
  text "VCC" at 85.7,63.2 h1.2
  text "M+" at 12.2,60.7 h1.2
  text "M+" at 85.7,60.7 h1.2
  text "FUSION FIGHTERS" at 35.421,59.55 h2
  text "LM" at 21.504,59.004 h1.52
  text "RM" at 76.004,59.004 h1.52
  text "BOOT0" at 10.95,37.2 h1.2
  text "OLED" at 62.95,37.2 h1.2
  text "BOOT1" at 83.7,36.95 h1.2
  text "+" at 69.45,34.5 h1.2
  text "GND" at 65.45,34.45 h1.2
  text "SDA" at 73.45,34.45 h1.2
  text "1" at 10.95,33.95 h1.2
  text "0" at 88.45,33.95 h1.2
  text "M" at 70.9,28.2 h1.2
  text "0" at 10.7,27.95 h1.2
  text "1" at 88.7,27.95 h1.2
  text "6V" at 20.55,16.2 h1.2 r90
  text "3V3" at 23.3,16.2 h1.2 r90
  text "GND" at 24.2,16.2 h1.2
  text "IMU" at 46.55,13.45 h1.2 r90
  text "PWR" at 29.55,11.95 h1.2 r90
  text "K" at 36.7,10.45 h1.2
  text "EXT" at 9.2,6.95 h1.2
  text "USB" at 13.45,6.95 h1.2
  text "DEBUG" at 17.45,6.95 h1.2
  text "A" at 23.7,5.95 h1.2
  text "B" at 34.2,5.95 h1.2
  text "GND" at 46.55,3.95 h1.2 r90
  text "NRST" at 48.8,3.95 h1.2 r90
  text "SWO" at 51.55,3.95 h1.2 r90
  text "SCK" at 54.05,3.95 h1.2 r90
  text "DIO" at 56.55,3.95 h1.2 r90
  text "3V3" at 59.05,3.95 h1.2 r90
  text "GND" at 75.1,3.9 h1.2 r90
  text "A15" at 75.9,3.9 h1.2
  text "12" at 79.7,3.9 h1.2
  text "11" at 82.5,3.9 h1.2
  text "C10" at 86.9,3.9 h1.2 r90
  text "+" at 87.9,3.8 h1.2
  text "NRST" at 91.8,2.5 h1.2 r90
  text "K" at 2.45,0.7 h1.2
  text "1" at 25.5,0.6 h1.2 r90
  text "1" at 36.3,0.5 h1.2 r90
  text "0" at 30.35,0.3 h1.2 r90
  text "0" at 41,0.3 h1.2 r90
Bottom Overlay:
  lines w0.4: 36.5,58.75 36.5,62.5 63,62.5 63,58.75 36.5,58.75
  lines w0.5: 10.5,17 11.75,17 ; 10.5,42.5 25.5,42.5 ; 10.5,57.5 25.5,57.5 ; 10.5,83 11.75,83 ; 15,17.25 15,19 ; 15,23 15,77 ; 15,81 15,82.75 ; 23,42.5 23,34.5 34.5,34.5 34.5,42.5 ; 23,57.5 23,65.5 34.5,65.5 34.5,57.5 ; 29,42.5 36.5,42.5 ; 29,57.5 36.5,57.5 ; 63.5,42.5 89.5,42.5 ; 63.5,57.5 89.5,57.5 ; 65.5,42.5 65.5,34.5 77,34.5 77,42.5 ; 65.5,57.5 65.5,65.5 77,65.5 77,57.5 ; 85,17.25 85,19 ; 85,23 85,77 ; 85,81 85,82.75 ; 88.25,17 89.5,17 ; 88.25,83 89.5,83
  text "FUSION FIGHTERS" at 61.908,59.55 h1.7
  text "LM" at 28,53.332 h4 r90
  text "RM" at 74.25,53.332 h4 r90
Mechanical 2:
  circle w0.5: c86.5,84 r1.5
  circle w0.5: c13.5,84 r1.5
  circle w0.5: c86.5,16 r1.5
  circle w0.5: c13.5,16 r1.5
  circle w0.25: c65.4,25.405 r0.125
  circle w0.25: c87.5,50.004 r0.125
  circle w0.25: c72.5,50 r0.125
  circle w0.25: c27.5,50 r0.125
  lines w0.5: 10,17.005 15,17.005 15,83.005 10,83.005 ; 10.072,57.5 45,57.5 ; 10.115,42.5 45,42.5 ; 23,42.5 23,34.5 34.5,34.5 34.5,42.5 ; 23,57.5 23,65.5 34.5,65.5 34.5,57.5 ; 65.5,42.5 65.5,34.5 77,34.5 77,42.5 ; 65.5,57.5 65.5,65.5 77,65.5 77,57.5 ; 45,42.5 37,42.5 37,57.5 45,57.5 ; 45,42.5 45,57.5 ; 55,42.5 55,57.5 ; 55,42.5 90,42.5 90,57.5 55,57.5 ; 55,42.5 63,42.5 63,57.5 55,57.5 ; 0,0 100,0 100,12.5 90,12.5 90,87.5 100,87.5 100,100 0,100 0,87.5 10,87.5 10,12.5 0,12.5 0,0 ; 15,19.455 15,22.555 19,22.555 cw(c19,21.005) 19,19.455 15,19.455 ; 15,77.455 15,80.555 19,80.555 cw(c19,79.005) 19,77.455 15,77.455 ; 26,40.9 ccw(c27.25,40.9) 28.5,40.9 28.5,42.5 26,42.5 26,40.9 ; 26,57.5 28.5,57.5 28.5,59.1 ccw(c27.25,59.1) 26,59.1 26,57.5 ; 71.5,40.9 ccw(c72.75,40.9) 74,40.9 74,42.5 71.5,42.5 71.5,40.9 ; 71.5,57.5 74,57.5 74,59.1 ccw(c72.75,59.1) 71.5,59.1 71.5,57.5 ; 81,19.454 cw(c81,21.004) 81,22.554 85,22.554 85,19.454 81,19.454 ; 81,77.454 cw(c81,79.004) 81,80.554 85,80.554 85,77.454 81,77.454 ; 85,17.004 85,83.004 90,83.004 90,17.004 85,17.004
Board Shape:
  the board outline again, w0.5